# EAGLE board Minisumo_V1 (EAGLE 9.6.2)
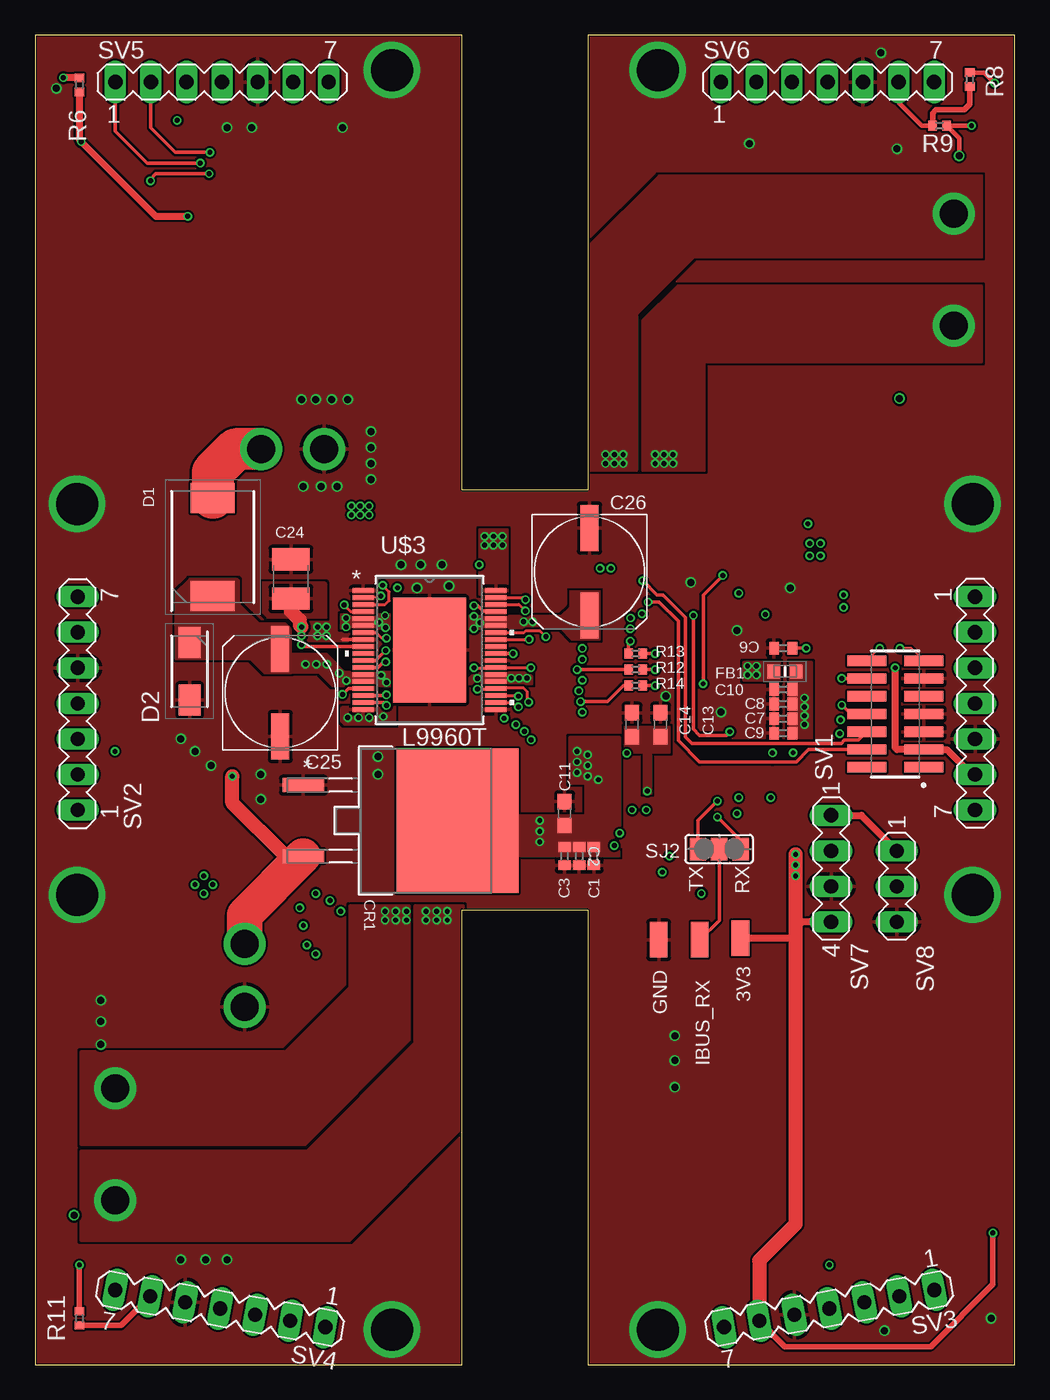
[diagram p0: board, top side]
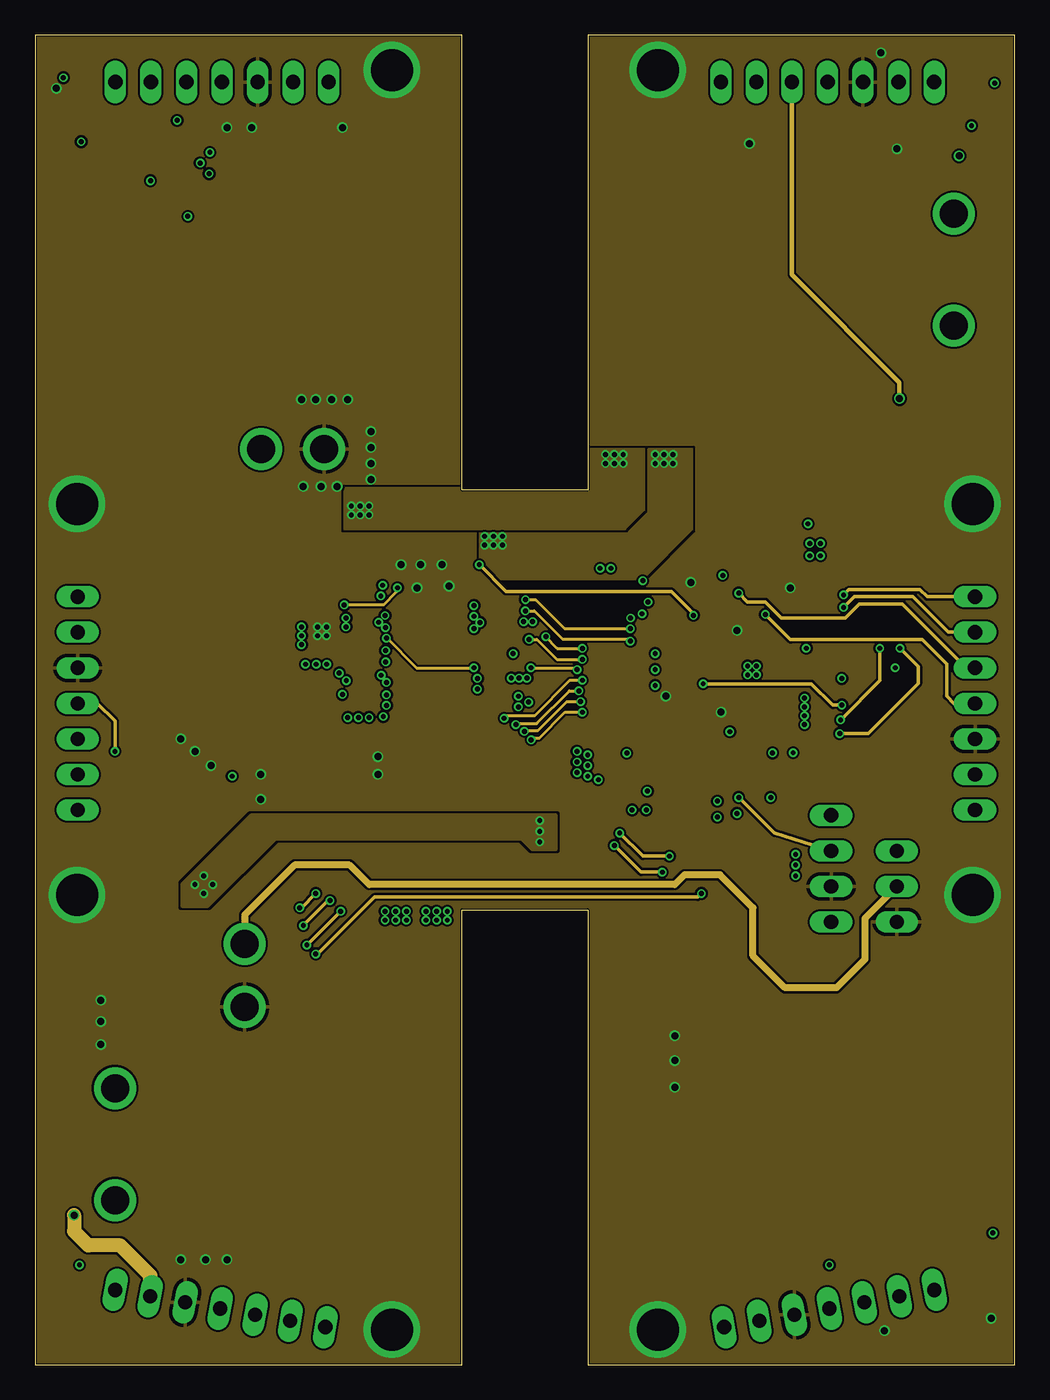
[diagram p1: board, inner layer Route2]
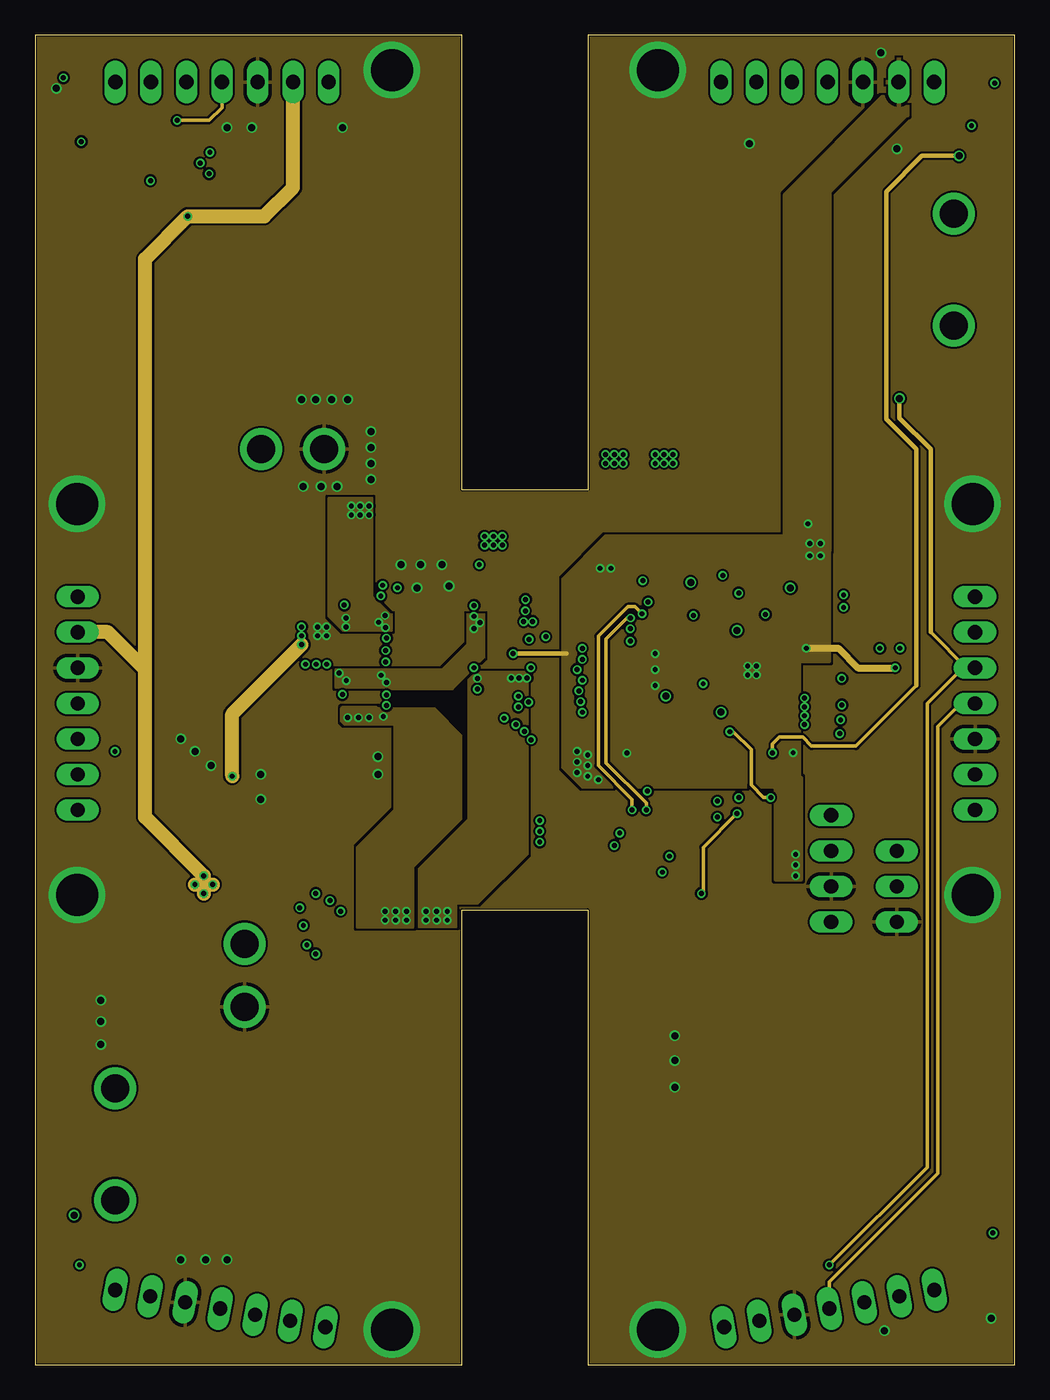
[diagram p2: board, inner layer Route15]
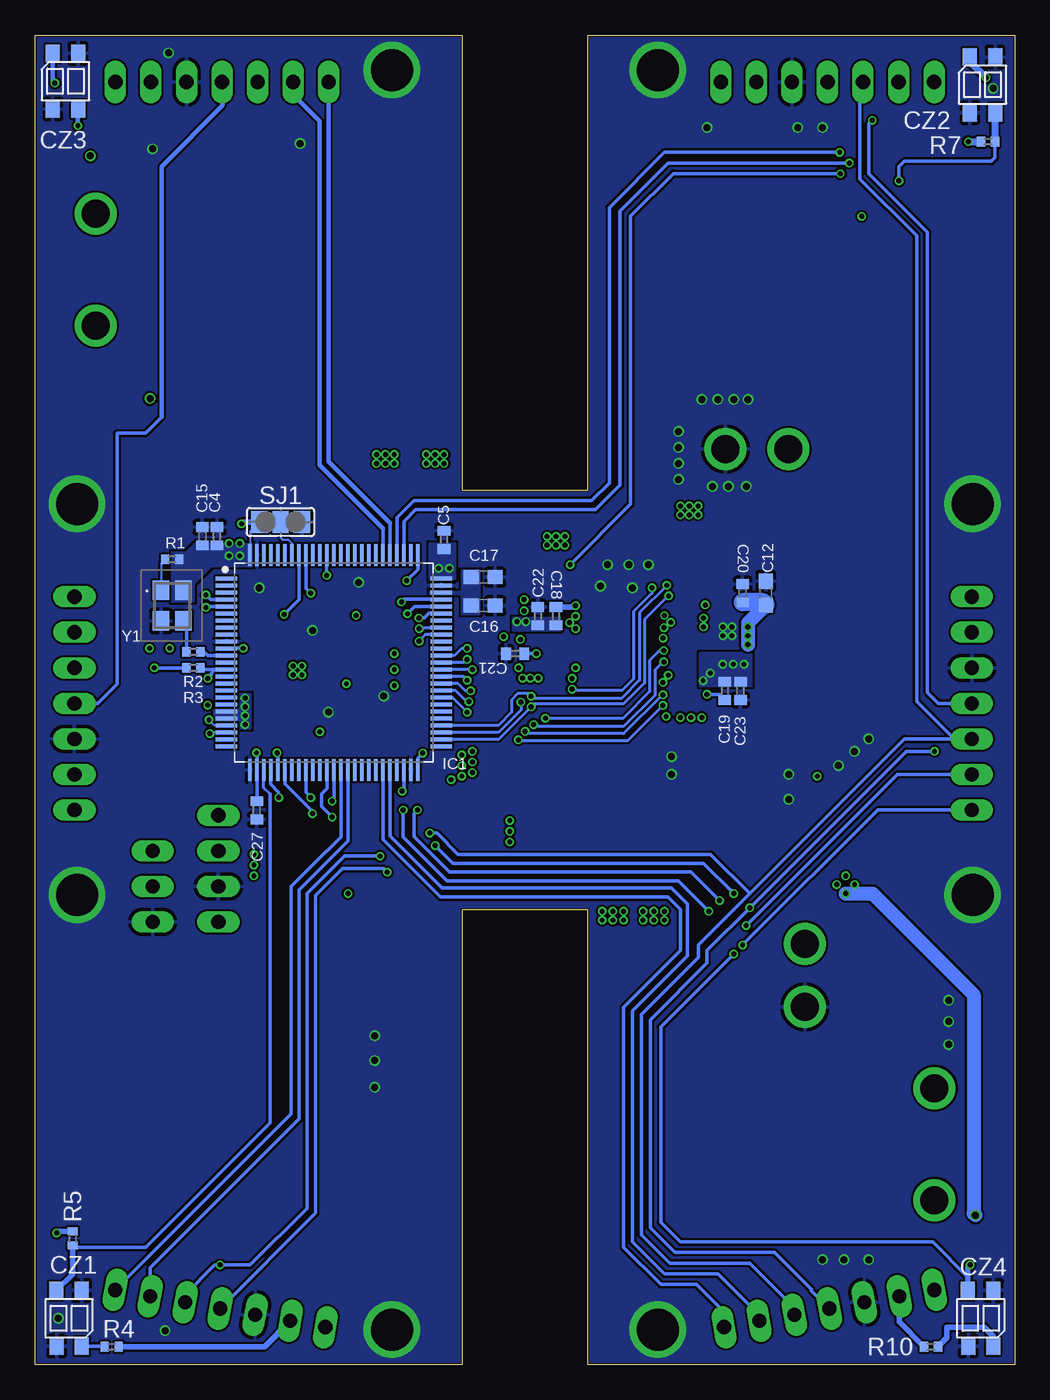
[diagram p3: board, bottom side, seen from below]

Size 70 x 95 mm. Coordinates in mm from the lower left corner, seen from the top.
Outline: 70,95 39.5,95 39.5,62.5 30.5,62.5 30.5,95 0,95 0,0 30.5,0 30.5,32.5 39.5,32.5 39.5,0 70,0 70,95
Copper layers (1*2*15*16): Top 0.035559375mm / dielectric 0.17018125mm / Route2 0.01778125mm / dielectric 47mil / Route15 0.01778125mm / dielectric 0.17018125mm / Bottom 0.035559375mm
Design rules "jlcpcb_4layer *": minimum track width 6mil, minimum drill 0.2mm, track to track 0.1525mm, track to pad 0.1525mm, pad to pad 0.1525mm, via to via 0.1525mm, smd to smd 0mil, copper to edge 0.1mm, drill to drill 5mil, minimum pad ring 5mil, minimum via ring 5mil, stop-mask expansion 3mil, vias tented up to drill 100mil, thermal gap 10mil
Net classes: 1 usb_diff: width 0.127 mm

## Footprints (pad centres in the part's own frame; a part is rotated, then mirrored left to right if it is on the bottom)
SMD1,27-2,54 = smd 1.27 x 2.54: 1 0,0
C0402 = smd 0.7 x 0.9: 1 -0.65,0; 2 0.65,0
C0603 = smd 1.1 x 1: 1 -0.85,0; 2 0.85,0
C1210 = smd 1.6 x 2.7: 1 -1.4,0; 2 1.4,0
UD-8X10_NICHICON = smd 3.3 x 1.3: + 3.125,0; - -3.125,0
D2PAK_STM = smd 0.99 x 2.986: 1 -2.54,-8.763; 2 2.54,-8.763 | smd 10.338 x 8.712: 3 0,2.248
TOP = smd 1.27 x 1: ANODA -1.985,-0.9; EMITER -1.985,0.9; KATODA 1.985,-0.9; KOLEKTOR 1.985,0.91
DIOM8059X265N = smd 2.15 x 3.15: 1 -3.5,0; 2 3.5,0
DIOM5126X265N = smd 2.2 x 1.55: 1 -2.05,0; 2 2.05,0
BEADC1608X95N = smd 0.9 x 1: 1 -0.8,0; 2 0.8,0
QFP50P1600X1600X160-100N = smd 1.559 x 0.28: 1 -7.678,6; 2 -7.678,5.5; 3 -7.678,5; 4 -7.678,4.5; 5 -7.678,4; 6 -7.678,3.5; 7 -7.678,3; 8 -7.678,2.5; 9 -7.678,2; 10 -7.678,1.5; 11 -7.678,1; 12 -7.678,0.5; 13 -7.678,0; 14 -7.678,-0.5; 15 -7.678,-1; 16 -7.678,-1.5; 17 -7.678,-2; 18 -7.678,-2.5; 19 -7.678,-3; 20 -7.678,-3.5; 21 -7.678,-4; 22 -7.678,-4.5; 23 -7.678,-5; 24 -7.678,-5.5; 25 -7.678,-6; 51 7.678,-6; 52 7.678,-5.5; 53 7.678,-5; 54 7.678,-4.5; 55 7.678,-4; 56 7.678,-3.5; 57 7.678,-3; 58 7.678,-2.5; 59 7.678,-2; 60 7.678,-1.5; 61 7.678,-1; 62 7.678,-0.5; 63 7.678,0; 64 7.678,0.5; 65 7.678,1; 66 7.678,1.5; 67 7.678,2; 68 7.678,2.5; 69 7.678,3; 70 7.678,3.5; 71 7.678,4; 72 7.678,4.5; 73 7.678,5; 74 7.678,5.5; 75 7.678,6 | smd 0.28 x 1.559: 26 -6,-7.678; 27 -5.5,-7.678; 28 -5,-7.678; 29 -4.5,-7.678; 30 -4,-7.678; 31 -3.5,-7.678; 32 -3,-7.678; 33 -2.5,-7.678; 34 -2,-7.678; 35 -1.5,-7.678; 36 -1,-7.678; 37 -0.5,-7.678; 38 0,-7.678; 39 0.5,-7.678; 40 1,-7.678; 41 1.5,-7.678; 42 2,-7.678; 43 2.5,-7.678; 44 3,-7.678; 45 3.5,-7.678; 46 4,-7.678; 47 4.5,-7.678; 48 5,-7.678; 49 5.5,-7.678; 50 6,-7.678; 76 6,7.678; 77 5.5,7.678; 78 5,7.678; 79 4.5,7.678; 80 4,7.678; 81 3.5,7.678; 82 3,7.678; 83 2.5,7.678; 84 2,7.678; 85 1.5,7.678; 86 1,7.678; 87 0.5,7.678; 88 0,7.678; 89 -0.5,7.678; 90 -1,7.678; 91 -1.5,7.678; 92 -2,7.678; 93 -2.5,7.678; 94 -3,7.678; 95 -3.5,7.678; 96 -4,7.678; 97 -4.5,7.678; 98 -5,7.678; 99 -5.5,7.678; 100 -6,7.678
SAMTEC_FTSH-107-01-L-DV-K-TR = smd 0.74 x 2.79: 01 -3.81,-2.035; 02 -3.81,2.035; 03 -2.54,-2.035; 04 -2.54,2.035; 05 -1.27,-2.035; 06 -1.27,2.035; 07 0,-2.035; 08 0,2.035; 09 1.27,-2.035; 10 1.27,2.035; 11 2.54,-2.035; 12 2.54,2.035; 13 3.81,-2.035; 14 3.81,2.035
R0402 = smd 0.6 x 0.7: 1 -0.5,0; 2 0.5,0
SJ_2 = smd 1.168 x 1.6: 1 -1.524,0; 2 0,0; 3 1.524,0
MA07-1 = drill 1.016 long: 1 -7.62,0; 2 -5.08,0; 3 -2.54,0; 4 0,0; 5 2.54,0; 6 5.08,0; 7 7.62,0
MA04-1 = drill 1.016 long: 1 -3.81,0; 2 -1.27,0; 3 1.27,0; 4 3.81,0
MA03-1 = drill 1.016 long: 1 -2.54,0; 2 0,0; 3 2.54,0
POWERSSO-36_STM = smd 1.549 x 0.33: 1 -4.737,4.25; 2 -4.737,3.75; 3 -4.737,3.25; 4 -4.737,2.75; 5 -4.737,2.25; 6 -4.737,1.75; 7 -4.737,1.25; 8 -4.737,0.75; 9 -4.737,0.25; 10 -4.737,-0.25; 11 -4.737,-0.75; 12 -4.737,-1.25; 13 -4.737,-1.75; 14 -4.737,-2.25; 15 -4.737,-2.75; 16 -4.737,-3.25; 17 -4.737,-3.75; 18 -4.737,-4.25; 19 4.737,-4.25; 20 4.737,-3.75; 21 4.737,-3.25; 22 4.737,-2.75; 23 4.737,-2.25; 24 4.737,-1.75; 25 4.737,-1.25; 26 4.737,-0.75; 27 4.737,-0.25; 28 4.737,0.25; 29 4.737,0.75; 30 4.737,1.25; 31 4.737,1.75; 32 4.737,2.25; 33 4.737,2.75; 34 4.737,3.25; 35 4.737,3.75; 36 4.737,4.25 | smd 5.207 x 7.493: EPAD 0,0
MD_OUT = drill 2: IN_1 0,4; IN_2 0,-4
BAT_POW = drill 2: P$1 0,2.25; P$2 0,-2.25
ECS3225MV = smd 1.4 x 1.2: 1 -1.1,-0.8; 2 1.1,-0.8; 3 1.1,0.8; 4 -1.1,0.8

## Placement (x,y rotation side)
3V3  [SMD1,27-2,54]  50.42,30.48 0 top
C1  100nF  [C0402]  39.93,36.32 270 top
C2  100nF  [C0402]  38.89,36.32 270 top
C3  100nF  [C0402]  37.85,36.32 270 top
C4  100nF  [C0402]  57,59.18 90 bottom
C5  100nF  [C0402]  40.77,58.93 90 bottom
C6  100nF  [C0402]  53.47,51.18 180 top
C7  100nF  [C0402]  53.47,46.15 180 top
C8  100nF  [C0402]  53.47,47.19 180 top
C9  1uF  [C0402]  53.47,45.11 180 top
C10  1uF  [C0402]  53.47,48.23 180 top
C11  10uF  [C0603]  37.85,39.37 90 top
C12  10uF  [C0603]  17.78,55.12 90 bottom
C13  2.2uF  [C0603]  44.7,45.72 90 top
C14  2.2uF  [C0603]  42.67,45.72 90 top
C15  100nF  [C0402]  58.04,59.18 90 bottom
C16  2.2uF  [C0603]  37.97,54.23 0 bottom
C17  2.2uF  [C0603]  37.97,56.26 0 bottom
C18  100nF  [C0402]  32.77,53.47 270 bottom
C19  100nF  [C0402]  20.7,48.13 90 bottom
C20  100nF  [C0402]  19.43,55.12 270 bottom
C21  100nF  [C0402]  35.69,50.8 180 bottom
C22  1uF  [C0402]  34.06,53.47 270 bottom
C23  1uF  [C0402]  19.58,48.13 90 bottom
C24  10uF  [C1210]  18.29,56.13 90 top
C25  100uF  [UD-8X10_NICHICON]  17.53,48.01 90 top
C26  100uF  [UD-8X10_NICHICON]  39.62,56.64 270 top
C27  100nF  [C0402]  54.15,39.6 270 bottom
CR1  LD1086DT33TR  [D2PAK_STM]  27.94,38.86 270 top
CZ1  KTIR0711S  [TOP]  67.56,3.3 90 bottom
CZ2  KTIR0711S  [TOP]  2.29,91.44 270 bottom
CZ3  KTIR0711S  [TOP]  67.82,91.69 270 bottom
CZ4  KTIR0711S  [TOP]  2.41,3.3 90 bottom
D1  STPS5L60S  [DIOM8059X265N]  12.7,58.42 90 top
D2  SMA6T33AY  [DIOM5126X265N]  11.05,49.53 270 top
FB1  MMZ1608Y601BTA00  [BEADC1608X95N]  53.59,49.53 0 top
GND  [SMD1,27-2,54]  44.58,30.35 0 top
IBUS_RX  [SMD1,27-2,54]  47.5,30.35 0 top
IC1  STM32H743VIT6NORMAL  [QFP50P1600X1600X160-100N]  48.64,50.16 0 bottom
J1  FTSH-107-01-L-DV-K-TR  [SAMTEC_FTSH-107-01-L-DV-K-TR]  61.47,46.48 90 top
R1  10k  [R0402]  60.2,57.53 180 bottom
R2  51  [R0402]  58.67,50.93 0 bottom
R3  10k  [R0402]  58.67,49.78 180 bottom
R4  200  [R0402]  64.52,1.27 0 bottom
R5  10k  [R0402]  67.31,9.02 90 bottom
R6  200  [R0402]  3.17,91.44 270 top
R7  10k  [R0402]  1.91,87.38 180 bottom
R8  200  [R0402]  66.8,91.82 270 top
R9  10k  [R0402]  64.64,88.52 180 top
R10  200  [R0402]  5.97,1.27 180 bottom
R11  10k  [R0402]  3.17,3.3 270 top
R12  10k  [R0402]  42.93,49.66 0 top
R13  10k  [R0402]  42.93,50.8 180 top
R14  10k  [R0402]  42.93,48.51 0 top
SJ1  [SJ_2]  52.45,60.2 180 bottom
SJ2  [SJ_2]  48.9,36.83 180 top
SV1  [MA07-1]  67.18,47.24 270 top
SV2  [MA07-1]  3.05,47.24 90 top
SV3  [MA07-1]  56.76,4 190 top
SV4  [MA07-1]  13.24,4 170 top
SV5  [MA07-1]  13.37,91.64 0 top
SV6  [MA07-1]  56.63,91.64 0 top
SV7  [MA04-1]  56.9,35.43 270 top
SV8  [MA03-1]  61.59,34.16 270 top
U$3  L9960T  [POWERSSO-36_STM]  28.19,51.05 0 top
U$4  MD_OUT  [MD_OUT]  65.66,78.23 0 top
U$5  MD_OUT  [MD_OUT]  5.71,15.75 180 top
U$6  BAT_POW  [BAT_POW]  18.41,65.41 90 top
U$7  BAT_POW  [BAT_POW]  14.99,27.81 0 top
Y1  ECS-3225MV  [ECS3225MV]  60.2,54.23 270 bottom

## Library data of the parts
3V3 GND IBUS_RX = wirepad
C1-C8 C15 C18-C21 C27 = AcceleratedDesigns_Lib
C9 C10 C22 C23 = rcl; MANUFACTURER_PART_NO: EMK105BJ105KV-F; SPICEPREFIX: C; VENDOR: Taiyo Yuden
C11 C12 C14 C17 = rcl; MANUFACTURER_PART_NO: GRM188R61E106KA73D; SPICEPREFIX: C; VENDOR: Murata
C13 C16 = rcl; MANUFACTURER_PART_NO: EMK107BJ225KA-T; SPICEPREFIX: C; VENDOR: Taiyo Yuden
C24 = rcl; MANUFACTURER_PART_NO: UMK325AB7106KMHP; SPICEPREFIX: C
C25 C26 = rcl; MANUFACTURER_PART_NO: RVT1H101M0810; SPICEPREFIX: C
CR1 = ST_Power; COPYRIGHT: Copyright (C) 2021 Ultra Librarian. All rights reserved.; MANUFACTURER_PART_NUMBER: LD1086DT33TR; MFR_NAME: STMicroelectronics
CZ1-CZ4 = KTIR0711S; MANUFACTURER_PART_NO: ITR8307/S18/TR8(B)
D1 = SamacSys_Parts; DESCRIPTION: STMicroelectronics STPS5L60S, SMT Schottky Diode, 60V 5A, 2-Pin DO-214AB; HEIGHT: 2.65mm; MANUFACTURER_NAME: STMicroelectronics; MANUFACTURER_PART_NUMBER: STPS5L60S; MOUSER_PART_NUMBER: 511-STPS5L60S; MOUSER_PRICE-STOCK: https://www.mouser.co.uk/ProductDetail/STMicroelectronics/STPS5L60S?qs=%252BB84zevwoRCxtciFC%252BzmMw%3D%3D
D2 = SamacSys_Parts; DESCRIPTION: ESD Suppressors / TVS Diodes 600W 4kW Transil SMA 5V to 70V Uni; HEIGHT: 2.65mm; MANUFACTURER_NAME: STMicroelectronics; MANUFACTURER_PART_NUMBER: SMA6T33AY; MOUSER_PART_NUMBER: 511-SMA6T33AY; MOUSER_PRICE-STOCK: https://www.mouser.co.uk/ProductDetail/STMicroelectronics/SMA6T33AY?qs=NW1tGwZwExGor%2FvZVbtWhA%3D%3D
FB1 = SamacSys_Parts; DESCRIPTION: TDK - MMZ1608Y601BTA00 - Ferrite Bead, 0603 [1608 Metric], 600 ohm, 500 mA, MMZ Series, 0.4 ohm, +/- 25%; HEIGHT: 0.95mm; MANUFACTURER_NAME: TDK; MANUFACTURER_PART_NUMBER: MMZ1608Y601BTA00; MOUSER_PART_NUMBER: 810-MMZ1608Y601BTA00; MOUSER_PRICE-STOCK: https://www.mouser.co.uk/ProductDetail/TDK/MMZ1608Y601BTA00?qs=pLY5GE0xrmIZFSJpXFN%252BVg%3D%3D
IC1 U$4-U$7 = SamacSys_Parts
J1 = FTSH-107-01-L-DV-K-TR; MANUFACTURER: Samtec; PARTREV: R; STANDARD: Manufacturer Recommendations
R1-R14 = rcl; SPICEPREFIX: R
SJ1 SJ2 = jumper
SV1-SV8 = con-lstb; OC_FARNELL: unknown; OC_NEWARK: unknown
U$3 = l9960
Y1 = ECS-3225MV; DESCRIPTION: 24MHz XO (Standard) HCMOS Oscillator 1.62V ~ 3.63V Enable/Disable 4-SMD, No Lead; HEIGHT: 1.2mm; MANUFACTURER_NAME: ECS; MANUFACTURER_PART_NUMBER: ECS-3225MV

## Nets
5V_SW: C12.1 C20.2 C24.1 CR1.2 SV8.2 U$3.9 U$7.P$1
+3.3V: 3V3.1 C1.1 C2.1 C3.1 C4.1 C5.1 C6.1 C11.1 C15.1 C21.1 C27.1 CR1.3 FB1.1 IC1.11 IC1.27 IC1.50 IC1.75 IC1.100 J1.03 R1.1 R3.2 R4.2 R5.2 R6.2 R7.2 R8.2 R9.2 R10.2 R11.2 R12.2 R13.1 R14.2 SJ1.3 SV1.6 SV2.6 SV3.6 SV4.6 SV5.6 SV6.6 SV7.4 U$3.27 Y1.4
GND: C1.2 C2.2 C3.2 C4.2 C5.2 C6.2 C7.2 C8.2 C9.2 C10.2 C11.2 C12.2 C13.2 C14.2 C15.2 C16.2 C17.2 C20.1 C21.2 C22.1 C23.1 C24.2 C25.- C26.- C27.2 CR1.1 CZ1.EMITER CZ1.KATODA CZ2.EMITER CZ2.KATODA CZ3.EMITER CZ3.KATODA CZ4.EMITER CZ4.KATODA D2.2 GND.1 IC1.10 IC1.26 IC1.49 IC1.74 IC1.99 J1.05 J1.07 J1.11 SJ1.1 SV1.5 SV2.5 SV3.5 SV4.5 SV5.5 SV6.5 SV7.3 SV8.3 U$3.1 U$3.8 U$3.19 U$3.26 U$3.EPAD U$6.P$2 U$7.P$2 Y1.2
IBUS_RX: IBUS_RX.1 SJ2.2
KILL_SW: SV7.1 SV8.1
MD_CS1: IC1.68 U$3.35
MD_CS2: IC1.58 U$3.17
MD_DIS1: IC1.67 R13.2 U$3.34
MD_DIS2: IC1.59 R14.1 U$3.16
MD_IN1_PWM_A: IC1.63 U$3.29
MD_IN1_PWM_B: IC1.61 U$3.11
MD_IN2_DIR_A: IC1.64 U$3.30
MD_IN2_DIR_B: IC1.60 U$3.12
MD_NDIS: IC1.62 R12.1 U$3.7 U$3.25
MD_OUT1A: U$3.5 U$3.6 U$4.IN_1
MD_OUT1B: U$3.23 U$3.24 U$5.IN_1
MD_OUT2A: U$3.36 U$4.IN_2
MD_OUT2B: U$3.18 U$5.IN_2
MD_VS: C18.2 C19.2 C22.2 C23.2 C25.+ C26.+ D1.1 D2.1 U$3.13 U$3.14 U$3.31 U$3.32
N$1: IC1.94 SJ1.2
N$2: R2.1 Y1.3
N$3: R1.2 Y1.1
N$4: IC1.12 R2.2
N$6: C18.1 U$3.33
N$8: CZ1.ANODA R4.1
N$9: CZ2.ANODA R6.1
N$10: CZ3.ANODA R8.1
N$11: CZ4.ANODA R10.1
N$16: C19.1 U$3.15
NRST: IC1.14 J1.12 R3.1
RX: IC1.37 SJ2.1
S_WIRE: IC1.38 SJ2.3
SPI_CLK: IC1.52 U$3.2 U$3.20
SPI_MISO: IC1.53 U$3.4 U$3.22
SPI_MOSI: IC1.54 U$3.3 U$3.21
START_SW: IC1.34 SV7.2
SWCLK: IC1.76 J1.06
SWDIO: IC1.72 J1.04
SWO: IC1.89 J1.08
TOF_GPIO1: IC1.4 SV1.1
TOF_GPIO2: IC1.70 SV2.1
TOF_GPIO3: IC1.39 SV3.1
TOF_GPIO4: IC1.45 SV4.1
TOF_GPIO5: IC1.78 SV5.1
TOF_GPIO6: IC1.80 SV6.1
TOF_SCL: IC1.92 SV1.3 SV2.3 SV3.3 SV4.3 SV5.3 SV6.3
TOF_SDA: IC1.93 SV1.4 SV2.4 SV3.4 SV4.4 SV5.4 SV6.4
V_BAT: D1.2 U$6.P$1
V_LS_1: CZ1.KOLEKTOR IC1.28 R5.1
V_LS_2: CZ2.KOLEKTOR IC1.29 R7.1
V_LS_3: CZ3.KOLEKTOR IC1.30 R9.1
V_LS_4: CZ4.KOLEKTOR IC1.31 R11.1
VCAP: C13.1 C14.1 IC1.48
VCAP_2: C16.1 C17.1 IC1.73
VCP_RX: IC1.23 J1.13
VCP_TX: IC1.22 J1.14
VDDA: C7.1 C8.1 C9.1 C10.1 FB1.2 IC1.20 IC1.21
VOUT_TOF1: SV1.7
VOUT_TOF2: SV2.7
VOUT_TOF3: SV3.7
VOUT_TOF4: SV4.7
VOUT_TOF5: SV5.7
VOUT_TOF6: SV6.7
XSHUT1: IC1.5 SV1.2
XSHUT2: IC1.71 SV2.2
XSHUT3: IC1.40 SV3.2
XSHUT4: IC1.46 SV4.2
XSHUT5: IC1.79 SV5.2
XSHUT6: IC1.81 SV6.2

## Tracks (layer width: path | path; a pad name or v marks a point on that pad's centre or on a via)
5V_SW  (via drill 0.35)
  Top 0.254: U$3.9 19.18,51.31 v19.05,51.44
  Top 1.016: CR1.2 17.91,36.32 14.1,40.13 v14.1,42.04 | v19.05,52.7 18.94,52.82 18.94,53.17 18.29,53.82 C24.1
  Top 2.54: U$7.P$1 14.99,32.13 CR1.2
  Route2 0.508: SV8.2 59.31,31.88 59.31,28.96 57.28,26.92 53.59,26.92 51.31,29.21 51.31,32.64 48.96,34.99 46.42,34.99 45.72,34.29 23.88,34.29 22.48,35.69 18.54,35.69 14.99,32.13 U$7.P$1
  Route15 1.016: v14.1,42.04 14.1,46.48 v19.05,51.44
  Bottom 1.016: C12.1 19.05,53 v19.05,52.7 v19.05,52.07 v19.05,51.44
  Bottom 1.27: C12.1 17.98,54.47 C20.2
  pour Top: 16.26,55.88 16.26,53.72 16.61,53.37 20.83,53.37 20.83,55.75 20.7,55.88
+3.3V  (via drill 0.35, 0.5)
  Top 0.254: C6.1 v55.12,51.18 | U$3.27 v34.16,50.8 | R13.1 v44.32,50.8 | R12.2 v44.32,49.66 | R14.2 v44.32,48.51
  Top 0.305: R9.2 63.37,88.52 61.72,90.18 SV6.6
  Top 0.406: SV3.6 53.61,1.27 64.01,1.27 68.45,5.71 v68.45,9.4 | R11.2 6.16,2.8 8.26,4.9 | R9.2 64.14,89.42 64.39,89.66 66.42,89.66 66.8,90.04 R8.2
  Top 0.508: v61.47,49.78 61.47,44.07 61.59,43.94 J1.03 65.15,43.94 66.93,42.16 SV1.6 | R6.2 3.17,87.5 v3.3,87.38 8.64,82.04 v10.92,82.04 | SV7.4 54.86,31.62 54.36,31.88 | 3V3.1 54.36,30.48
  Top 1.016: 8.26,4.9 SV4.6 | v54.36,36.45 54.36,31.88 54.36,30.48 54.36,10.03 51.76,7.44 SV3.6
  Route2 1.016: SV4.6 8.23,6.37 6.1,8.51 3.81,8.51 2.79,9.53 v2.79,10.67
  Route15 0.305: v34.16,50.8 37.97,50.8
  Route15 0.508: v55.12,51.18 57.4,51.18 58.8,49.78 v61.47,49.78
  Route15 1.016: SV2.6 5.21,52.32 7.87,49.66 | 7.87,49.66 7.87,39.12 v12.06,34.92 v12.06,33.66 | 7.87,49.66 7.87,78.99 v10.92,82.04 16.38,82.04 18.45,84.1 SV5.6 | v11.43,34.29 v12.7,34.29
  Bottom 0.152: SJ1.3 54.64,59.53 IC1.100 | C27.1
  Bottom 0.254: C27.1 IC1.27 54.14,43.68 v54.18,43.71 | IC1.50 42.64,43.34 v42.29,43.69 | v55.12,51.18 56.3,51.18 IC1.11 | C21.1 v34.16,50.8 | v61.47,49.78 R3.2
  Bottom 0.406: R4.2 53.61,1.27 SV3.6 | v68.45,9.4 68.33,9.52 R5.2 | R10.2 8.23,3.04 SV4.6 | SJ1.3 55.12,60.2 v55.24,60.07
  Bottom 0.508: v3.3,87.38 R7.2
  Bottom 1.016: v12.06,33.66 10.16,33.66 2.92,26.42 2.92,10.79 v2.79,10.67
  other vias: 50.93,49.91 50.93,49.28 51.56,49.28 51.56,49.91 38.73,43.81 39.5,43.56 38.73,43.05 38.73,42.29 39.5,42.04 39.5,42.8 40.26,41.78 54.36,34.92 54.36,35.69 36.07,38.86 36.07,38.1 36.07,37.34 55.37,57.78 56.13,57.78 55.37,58.67 56.13,58.67 40.39,56.9 41.15,56.9
  pour Bottom (no thermals): 54.48,58.67 54.48,57.02 57.4,57.02 58.67,55.75 58.67,54.48 60.2,54.48 60.2,58.04 59.18,58.04 58.55,58.67
  pour Top (no thermals): 34.04,39.24 34.04,36.32 41.78,36.32 41.78,39.24
  pour Route15: 54.61,41.27 39.12,41.27 37.72,42.67 37.72,56.13 40.77,59.18 56.77,59.18 56.77,50.23 54.61,50.23
  pour Top (no thermals): 53.21,48.9 50.67,48.9 50.67,50.16 53.21,50.16
  pour Top: 39.37,38.23 39.37,41.53 38.23,41.53 38.23,44.83 41.78,44.83 41.78,38.23
  pour Route15: 53.59,58.42 53.59,83.57 60.96,90.93 60.96,92.84 61.34,93.22 62.36,93.22 62.36,89.28 62.29,89.34 56.77,83.82 56.77,58.17 53.85,58.17
  pour Route15: 52.96,41.91 52.96,34.67 54.74,34.67 54.74,41.91
  pour Route2: 37.21,36.83 37.21,39.24 15.49,39.24 10.54,34.29 10.54,32.77 12.32,32.77 17.14,37.59 34.8,37.59 35.56,36.83
  pour Bottom (no thermals): 41.15,58.67 40.01,58.67 40.01,56.13 41.78,56.13 41.78,58.67
GND  (via drill 0.35, 0.5, 3)
  Top 0.254: 21.97,51.81 22.68,51.81 22.7,51.8 U$3.8
  other vias: 3,61.5 25.5,2.5 3,33.55 25.5,92.5 44.5,92.5 67,61.5 67,33.55 44.5,2.5 20.19,52.7 20.19,52.07 20.83,52.07 20.83,52.7 19.05,68.96 20.07,68.96 21.21,68.96 22.35,68.96 24,66.67 24,65.53 24,64.39 24,63.25 21.59,62.74 20.45,62.74 19.18,62.74 10.41,44.7 11.43,43.81 12.57,42.8 4.7,26.04 4.7,24.51 4.7,22.86 12.19,7.49 13.72,7.49 10.41,7.49 45.72,23.5 45.72,21.72 45.72,19.81 60.71,2.41 68.33,3.3 45.09,47.75 50.16,52.45 46.86,55.88 49.02,46.61 53.98,55.5 15.49,88.39 21.97,88.39 13.72,88.39 1.52,91.19 51.05,87.25 61.59,86.87 60.45,93.73 16.13,40.39 16.13,42.16 24.51,42.16 24.51,43.43 26.16,57.15 27.56,57.15 29.08,57.15 29.59,55.63 27.3,55.5
  pour Top (rank 6): 0,-0.64 30.48,-0.64 30.48,32.38 39.37,32.38 39.37,0 70.48,0 70.48,95.25 39.37,95.25 39.37,62.87 30.48,62.87 30.48,95.25 0,95.25
  pour Bottom (rank 6): -1.02,95 -1.02,-0.76 72.64,-0.76 72.64,95
  pour Route2 (rank 6): -2.03,95.25 -2.03,-0.51 71.63,-0.51 71.63,95.25
  pour Route15 (rank 6): -2.29,95.25 -2.29,-0.64 71.75,-0.64 71.75,95.25
IBUS_RX
  Top 0.254: IBUS_RX.1 48.9,31.75 SJ2.2
KILL_SW
  Top 0.508: SV7.1 59.05,39.24 SV8.1
MD_CS1  (via drill 0.35)
  Top 0.2: U$3.35 34.9,54.8 v35.05,54.66
  Route2 0.2: v35.05,54.66 35.77,54.66 37.85,52.58 v42.55,52.58
  Bottom 0.2: v42.55,52.58 42.42,52.58 42.33,52.66 IC1.68
MD_CS2  (via drill 0.35)
  Top 0.254: U$3.17 24.91,47.3 v25.12,47.09
  Route2 0.2: v35.45,44.64 35.56,44.74 36.01,44.74 37.88,46.61 v39.12,46.61
  Bottom 0.2: v25.12,47.09 27.64,44.58 35.4,44.58 v35.45,44.64 | v39.12,46.61 40.17,47.66 IC1.58
MD_DIS1  (via drill 0.35)
  Top 0.2: U$3.34 34.59,54.3 v35.04,53.85
  Top 0.254: v42.55,51.68 42.43,51.56 R13.2
  Route2 0.2: v35.04,53.85 35.69,53.85 37.72,51.81 42.42,51.81 v42.55,51.68
  Bottom 0.2: v42.55,51.68 42.55,51.72 42.11,52.16 IC1.67
MD_DIS2  (via drill 0.35)
  Top 0.254: U$3.16 25.07,47.8 v25.12,47.85 | R14.1 42.06,48.51 40.92,47.37 v38.99,47.37
  Route2 0.2: v34.98,45.24 35.05,45.32 35.96,45.32 38.01,47.37 v38.99,47.37
  Bottom 0.2: 25.17,47.85 27.94,45.09 34.81,45.09 v34.98,45.24 | v38.99,47.37 39.17,47.37 39.96,48.16 IC1.59
  Bottom 0.254: 25.17,47.85 v25.12,47.85
MD_IN1_PWM_A  (via drill 0.35)
  Top 0.2: U$3.29 32.94,51.82 v35.31,51.82
  Route2 0.2: v35.31,51.82 35.86,51.82 37.29,50.39 v39.12,50.39
  Bottom 0.2: v39.12,50.39 39.34,50.16 IC1.63
MD_IN1_PWM_B  (via drill 0.35)
  Top 0.254: U$3.11 24.34,50.31 25.04,51.02 v25.06,51.02
  Route2 0.2: v33.53,46.18 33.71,46.35 35.69,46.35 38.23,48.9 v39.12,48.9
  Bottom 0.2: v25.06,51.02 25.38,51.02 26.09,50.31 26.09,48.07 27.98,46.18 v33.53,46.18 | v39.12,48.9 39.39,49.16 IC1.61
MD_IN2_DIR_A  (via drill 0.35)
  Top 0.2: U$3.30 34.96,52.3 35.1,52.45 36.07,52.45 v36.51,52
  Route2 0.2: v36.51,52 36.51,51.97 37.31,51.17 v39.12,51.17
  Bottom 0.2: v39.12,51.17 39.5,51.17 40.01,50.66 IC1.64
MD_IN2_DIR_B  (via drill 0.35)
  Top 0.254: U$3.12 24.51,49.81 24.81,50.1 24.95,50.1 v25.06,50.21
  Route2 0.2: v34.37,45.73 34.44,45.8 35.85,45.8 38.18,48.13 v38.86,48.13
  Bottom 0.2: 25.14,50.19 25.7,49.62 25.7,47.82 27.93,45.59 34.36,45.59 34.37,45.6 v34.37,45.73 | v38.86,48.13 39.24,48.13 39.77,48.66 IC1.60
  Bottom 0.254: v25.06,50.21 25.06,50.19 25.14,50.19
MD_NDIS  (via drill 0.35)
  Top 0.2: v35.43,49.78 35.41,49.8 U$3.25 32.91,49.78 v31.37,49.78 | v25.12,51.9 24.77,51.9 24.37,52.3 U$3.7
  Top 0.254: R12.1 v38.73,49.66
  Route2 0.2: v35.43,49.78 38.61,49.78 v38.73,49.66 | v25.12,51.9 25.14,51.9 27.26,49.78 v31.37,49.78
  Bottom 0.2: IC1.62 v38.73,49.66
MD_OUT1A  (via drill 0.35)
  other vias: 24.56,53.04 25.02,53.52 25.04,52.65 22.23,53.34 22.23,52.7 22.61,60.71 23.24,60.71 23.88,60.71 22.61,61.34 23.24,61.34 23.88,61.34 40.77,65.02 41.4,65.02 42.04,65.02 40.77,64.39 41.4,64.39 42.04,64.39
  pour Top (no thermals): 25.4,53.59 21.84,53.59 21.84,52.58 25.4,52.58
  pour Route15: 20.95,61.91 20.95,53.47 21.97,52.45 25.53,52.45 25.53,53.59 25.4,53.59 24.13,54.86 24.13,61.91
  pour Route2: 22.1,62.61 22.1,59.69 42.16,59.69 43.56,61.09 43.56,65.41 39.5,65.41 39.5,62.61
  pour Top (no thermals): 39.5,63.88 43.05,63.88 43.05,75.06 47.12,79.12 67.69,79.12 67.69,84.96 44.58,84.96 39.5,79.88
MD_OUT1B  (via drill 0.35)
  other vias: 27.94,32.38 28.7,32.38 29.46,32.38 28.7,31.75 29.46,31.75 27.94,31.75 31.62,49.02 34.04,49.05 34.59,49.05 35.15,49.05
  pour Top (no thermals): 35.18,49.53 31.5,49.53 30.99,49.02 30.99,48.64 35.56,48.64 35.56,49.15
  pour Route15: 30.99,38.99 30.99,48.95 31.57,49.53 35.05,49.53 35.18,49.4 35.18,36.45 31.62,32.89 30.1,32.89 30.1,31.24 27.43,31.24 27.43,35.43
  pour Top (no thermals): 27.18,32.77 27.18,22.99 19.43,15.24 3.3,15.24 3.3,8.89 22.48,8.89 30.61,17.02 30.61,32.77
MD_OUT2A  (via drill 0.35)
  other vias: 32.13,59.18 32.77,59.18 33.4,59.18 32.13,58.55 32.77,58.55 33.4,58.55 44.32,65.02 44.96,65.02 45.59,65.02 44.32,64.39 44.96,64.39 45.59,64.39
  pour Top: 33.78,54.99 31.75,54.99 31.75,59.69 33.78,59.69
  pour Route2 (rank 2): 31.75,56.13 43.43,56.13 46.99,59.69 46.99,65.41 43.81,65.41 43.81,61.09 42.16,59.44 31.75,59.44
  pour Top (no thermals): 43.38,63.88 47.88,63.88 47.88,71.63 67.69,71.63 67.69,77.09 45.9,77.09 43.38,74.57
MD_OUT2B  (via drill 0.35)
  other vias: 25.02,32.38 25.78,32.38 26.54,32.38 25.02,31.75 25.78,31.75 26.54,31.75 22.35,46.23 23.11,46.23 23.88,46.23 24.89,46.3
  pour Top: 25.78,46.99 21.97,46.99 21.84,46.86 21.84,45.97 22.1,45.72 25.78,45.72
  pour Route15: 24.51,46.86 24.38,46.99 21.97,46.99 21.84,46.86 21.84,45.97 22.1,45.72 25.65,45.72 25.65,39.62 22.99,36.96 22.99,31.24 27.05,31.24 27.05,35.56 30.48,38.99 30.48,44.96 28.57,46.86
  pour Top (no thermals): 22.5,32.77 22.5,26.95 17.91,22.35 3.3,22.35 3.3,15.75 19.3,15.75 26.75,23.19 26.75,32.77
MD_VS  (via drill 0.35)
  other vias: 31.37,53.47 31.37,52.58 31.8,53.01 24.74,49.25 21.74,49.4 22.25,48.87 25.12,48.74 20.85,50.04 20.09,50.04 19.33,50.04 34.92,53.09 35.56,53.09
  pour Top (no thermals): 14.48,56.13 11.05,56.13 10.03,55.12 10.03,50.42 15.37,50.42 16.38,49.4 18.29,49.4 18.29,52.58 17.91,52.96 16,52.96 14.61,54.36 14.61,56.01
  pour Top (no thermals): 25.53,49.53 25.53,48.44 21.29,48.44 20.32,49.4 18.29,49.4 18.29,50.8 20.83,50.8 22.1,49.53
  pour Top (no thermals): 33.78,53.47 30.99,53.47 30.99,52.58 33.78,52.58
  pour Route15: 32.13,53.59 30.86,53.59 30.86,51.44 29.08,49.66 21.46,49.66 21.46,48.39 25.27,48.39 25.4,48.26 29.84,48.26 32.13,50.55
  pour Top (no thermals): 40.39,55.24 38.23,55.24 38.23,54.1 37.59,53.47 33.66,53.47 33.66,52.58 37.59,52.58 38.35,51.82 40.39,51.82
  pour Bottom (no thermals): 18.8,48.51 18.8,50.8 22.48,50.8 22.48,48.51
  pour Bottom (no thermals): 35.81,53.34 32.51,53.34 32.51,52.45 35.81,52.45
N$1
  Bottom 0.152: SJ1.2 52.45,59.08 52.32,58.95 51.92,58.95 51.64,58.68 IC1.94
N$2
  Bottom 0.152: Y1.3 59.17,52.91
  Bottom 0.254: 59.17,52.91 R2.1
N$3
  Bottom 0.152: R1.2 61,57.23 Y1.1
N$4
  Bottom 0.152: IC1.12 56.33,50.67
  Bottom 0.254: R2.2 57.91,50.93 57.66,50.67 56.33,50.67
N$6  (via drill 0.35)
  Top 0.254: U$3.33 32.9,53.84 32.03,53.84 31.63,54.23 v31.37,54.23
  Bottom 0.406: C18.1 31.48,54.12 v31.37,54.23
N$8
  Bottom 0.254: R4.1 65.06,1.32 CZ1.ANODA
N$9  (via drill 0.35)
  Top 0.508: R6.1 v2.04,91.94 v2.03,91.95
  Bottom 0.508: v2.03,91.95 3.19,93.1 CZ2.ANODA
N$10  (via drill 0.35)
  Top 0.305: R8.1 67.83,92.32 v68.58,91.57
  Bottom 0.305: v68.58,91.57 68.72,91.7 CZ3.ANODA
N$11
  Bottom 0.406: R10.1 4.83,1.91 4.83,2.67 2.16,2.67 1.51,2.02 CZ4.ANODA
N$16  (via drill 0.35)
  Top 0.254: v21.97,47.88 22.4,48.3 U$3.15
  Bottom 0.254: C19.1 21.1,47.88 v21.97,47.88
NRST  (via drill 0.35)
  Top 0.254: v57.66,49.02 J1.12
  Bottom 0.152: IC1.14 57.15,49.66 | 58.05,49.66 R3.1
  Bottom 0.254: v57.66,49.02 57.43,49.25 57.43,49.39 57.15,49.66 | IC1.14 58.05,49.66
RX  (via drill 0.35)
  Top 0.254: SJ2.1 50.42,37.47 v48.77,39.12
  Bottom 0.254: v48.77,39.12 49.53,39.88 49.53,40.77 49.14,41.16 IC1.37
S_WIRE  (via drill 0.35)
  Top 0.254: SJ2.3 47.37,38.86 v48.77,40.26
  Bottom 0.254: v48.77,40.26 48.64,40.39 IC1.38
SPI_CLK  (via drill 0.35)
  Top 0.152: v24.71,54.91 24.6,54.8 U$3.2
  Top 0.2: U$3.20 34.1,47.3 34.42,46.99 v34.54,46.99
  Bottom 0.2: v24.71,54.91 24.77,54.91 26.44,53.24 26.44,48.69 27.91,47.22 34.31,47.22 v34.54,46.99 36.87,44.66 IC1.52
SPI_MISO  (via drill 0.35)
  Top 0.152: 32.89,48.26 U$3.22
  Top 0.2: v35.28,47.33 35.15,47.46 35.15,48.1 34.9,48.35 32.98,48.35 U$3.22 | v31.62,48.26 32.89,48.26 | U$3.4 23.44,53.78 22.59,53.78 v22.1,54.27
  Route2 0.2: v25.91,55.5 25.85,55.44 25.85,55.21 24.91,54.27 v22.1,54.27
  Bottom 0.2: v31.62,48.26 31.55,48.18 28.03,48.18 27.23,48.99 27.23,53.8 25.91,55.12 v25.91,55.5 | v35.28,47.33 35.28,46.76 36.88,45.16 IC1.53
SPI_MOSI  (via drill 0.35)
  Top 0.152: 34.49,47.8 v34.54,47.75
  Top 0.2: U$3.21 34.49,47.8 | U$3.3 25.04,54.3 25.32,54.59 25.32,55.2 v24.84,55.68
  Bottom 0.152: v34.54,47.75 34.72,47.93
  Bottom 0.2: 34.72,47.93 35.51,47.93 35.94,47.5 35.94,46.61 36.88,45.66 IC1.54 | v24.84,55.68 26.8,53.72 26.8,48.9 28.07,47.62 34.42,47.62 v34.54,47.75
START_SW  (via drill 0.35)
  Route2 0.254: SV7.2 52.86,37.97 50.32,40.51 v50.29,40.51
  Bottom 0.254: v50.29,40.51 50.64,40.86 IC1.34
SWCLK  (via drill 0.35)
  Top 0.254: J1.06 58.84,44.62 57.86,44.62 57.62,44.38 46.93,44.38 46.48,44.83 46.48,53.37 44.86,54.99 44.45,54.99 v43.43,56.01
  Bottom 0.254: v43.43,56.01 42.64,56.8 IC1.76
SWDIO  (via drill 0.35)
  Top 0.254: J1.04 55.28,43.94 54.4,43.06 52.71,43.06 52.7,43.05 47.5,43.05 45.97,44.58 45.97,53.11 44.6,54.48 v43.81,54.48
  Bottom 0.254: v43.81,54.48 43.62,54.68 40.98,54.68 IC1.72
SWO  (via drill 0.35)
  Top 0.254: J1.08 58.3,46.48 v57.66,47.12 | v47.75,48.64 47.75,54.99 v49.15,56.39
  Route2 0.254: v57.66,47.12 57.02,47.12 55.5,48.64 v47.75,48.64
  Bottom 0.254: v49.15,56.39 IC1.89
TOF_GPIO1  (via drill 0.35)
  Route2 0.254: SV1.1 63.75,54.86 63.24,55.37 58.16,55.37 v57.78,54.99
  Bottom 0.254: v57.78,54.99 57.46,54.66 IC1.4
TOF_GPIO2  (via drill 0.35)
  Route2 0.254: v21.84,32.38 v19.43,29.97
  Route15 0.254: v42.57,53.34 42.31,53.34 40.82,51.85 40.82,43 43.69,40.13 v43.69,39.62
  Bottom 0.254: SV2.1 9.78,39.62 v19.43,29.97 | v21.84,32.38 24,34.55 40.54,34.55 43.69,37.69 v43.69,39.62 | IC1.70 40.98,53.69 41.85,53.69 42.19,53.34 v42.57,53.34
TOF_GPIO3
  Bottom 0.254: SV3.1 51.69,17.9 51.69,34.17 49.15,36.7 49.14,36.71 48.14,37.71 IC1.39
TOF_GPIO4
  Bottom 0.254: IC1.45 45.14,37.52 41.02,33.4 24.77,33.4 23.88,32.51 23.88,29.59 27.94,25.53 27.94,8.38 25.27,5.71 22.73,5.71 20.74,3.72 SV4.1
TOF_GPIO5  (via drill 0.35)
  Top 0.254: SV5.1 5.75,88.11 8,85.85 v11.81,85.85
  Bottom 0.254: v11.81,85.85 24.77,85.85 28.2,82.42 28.2,62.83 29.94,61.09 42.8,61.09 43.64,60.24 IC1.78
TOF_GPIO6
  Bottom 0.254: 44.64,60.13 IC1.80
  Bottom 0.305: SV6.1 49.02,64.51 44.64,60.13
TOF_SCL  (via drill 0.35, 0.5)
  Route2 0.254: SV1.3 66.55,49.78 61.98,54.36 58.93,54.36 57.91,53.34 53.34,53.34 52.2,54.48 50.93,54.48 v50.29,55.12 | v45.34,36.32 43.43,36.32 v41.78,37.97
  Route2 0.305: v61.78,69.03 61.78,70.17 54.09,77.86 SV6.3
  Route15 0.254: v56.77,7.11 63.75,14.1 63.75,47.24 66.29,49.78 SV1.3 66.55,49.78 64.01,52.32
  Route15 0.305: 64.01,52.32 64.01,64.67 64.01,65.41 61.78,67.63 v61.78,69.03
  Bottom 0.254: SV4.3 15.74,4.05 18.92,7.24 24.64,7.24 26.67,9.27 26.67,25.02 22.61,29.08 22.61,29.97 18.92,33.66 | SV3.3 59.26,5 57.15,7.11 v56.77,7.11 54.61,7.11 50.55,11.18 50.55,33.66 47.88,36.32 v45.34,36.32 | IC1.92 50.64,55.46 v50.29,55.12 | 18.92,33.66 7.88,44.7 SV2.3 4.32,44.7 6.99,47.37 6.99,80.64 11.05,84.71 11.05,91.41 SV5.3 | v41.78,37.97 41.27,37.97 39.75,36.45 21.72,36.45 18.92,33.66
TOF_SDA  (via drill 0.35)
  Route2 0.254: v52.2,53.59 54,51.79 63.4,51.79 65.15,50.04 65.15,47.75 65.66,47.24 SV1.4 | v5.71,43.81 5.71,45.97 4.45,47.24 SV2.4 | v44.83,35.18 43.31,35.18 v41.4,37.08 | v20.07,33.66 19.05,32.64 v18.92,32.64
  Route15 0.254: SV3.4 56.76,5.91 64.52,13.66 64.52,45.59 66.17,47.24 SV1.4 | v10.16,88.9 12.45,88.9 13.37,89.82 SV5.4
  Bottom 0.254: SV4.4 14.51,5.27 14.51,5.36 17.14,8 24.26,8 26.04,9.78 26.04,24.64 21.97,28.7 21.97,29.59 v18.92,32.64 7.75,43.81 v5.71,43.81 | SV1.4 65.53,47.24 64.14,48.64 64.14,66.55 62.1,66.55 60.96,67.69 | IC1.93 51.14,54.65 v52.2,53.59 | SV2.4 5.46,47.24 6.22,48 6.22,80.9 10.41,85.09 10.41,88.65 v10.16,88.9 | SV3.4 49.94,10.83 49.94,33.5 48.01,35.43 45.09,35.43 v44.83,35.18 | v41.4,37.08 40.13,35.81 22.23,35.81 v20.07,33.66 | 56.58,91.58 SV6.4
  Bottom 0.305: 60.96,67.69 60.96,85.6 56.58,89.98 56.58,91.58
V_BAT
  Top 3: U$6.P$1 14.35,65.41 12.7,63.75 D1.2
V_LS_1
  Bottom 0.2: 53.21,40.77 53.65,41.2 IC1.28
  Bottom 0.254: R5.1 67.17,8.38 62.1,8.38 53.21,17.27 53.21,40.77
  Bottom 0.406: CZ1.KOLEKTOR 67.31,6.45 R5.1
V_LS_2  (via drill 0.35)
  Top 0.254: v12.45,85.09 8.64,85.09 8.26,84.71 v8.26,84.58 | v47.05,53.53 47.05,45.4 47.5,44.96 49.4,44.96 v49.66,45.21
  Route2 0.254: v31.75,57.15 33.66,55.24 45.47,55.24 47.05,53.66 v47.05,53.53
  Route15 0.254: v49.66,45.21 49.91,45.21 51.18,43.94 51.18,41.4 52.07,40.51 v52.58,40.51
  Bottom 0.254: v8.26,84.58 8.26,85.6 7.87,85.98 1.65,85.98 1.41,86.22 R7.1 | v12.45,85.09 24.38,85.09 27.43,82.04 27.43,61.47 v31.75,57.15 | IC1.29 53.16,42.47 53.16,41.48 52.58,40.89 v52.58,40.51
  Bottom 0.508: CZ2.KOLEKTOR 1.4,89.43 R7.1
V_LS_3  (via drill 0.35, 0.5)
  Top 0.305: v66.04,86.36 66.04,87.62 R9.1 v66.93,88.52
  Route15 0.254: 62.99,48.51 58.67,44.2 55.5,44.2 54.86,44.83 53.21,44.83 52.7,44.32 v52.7,43.7
  Route15 0.305: v66.04,86.36 63.37,86.36 60.83,83.82 60.83,67.56 62.99,65.41 62.99,48.51
  Bottom 0.254: v52.7,43.7 52.63,43.62 52.63,42.5 IC1.30
  Bottom 0.305: CZ3.KOLEKTOR 66.93,89.69 v66.93,88.52
V_LS_4  (via drill 0.35)
  Top 0.406: R11.1 v3.17,7.11
  Route2 0.2: 20.19,29.34 v20.07,29.34
  Route2 0.254: v47.62,33.66 47.37,33.4 24.26,33.4 20.19,29.34
  Route15 0.2: 47.75,33.78 v47.62,33.66
  Route15 0.254: v50.16,39.37 47.75,36.96 47.75,33.78
  Bottom 0.2: IC1.31
  Bottom 0.254: IC1.31 52.13,41.49 50.09,39.44 v50.16,39.37 | v20.07,29.34 25.27,24.13 25.27,10.16 23.88,8.76 5.84,8.76 3.32,6.24 CZ4.KOLEKTOR
  Bottom 0.406: v3.17,7.11 3.32,6.96 CZ4.KOLEKTOR
VCAP  (via drill 0.35)
  Bottom 0.254: IC1.48 43.64,41.09 v43.76,40.97
  pour Top (no thermals): 43.54,40.77 43.54,43.69 42.16,43.69 42.16,45.59 45.34,45.59 45.34,43.69 44.02,43.69 44.02,40.77
VCAP_2
  pour Bottom (no thermals): 38.23,56.77 38.23,53.59 39.5,53.59 39.5,55.02 41.78,55.02 41.78,55.24 39.5,55.24 39.5,56.77
VCP_RX  (via drill 0.35)
  Top 0.152: J1.13 62.61,51.18 v61.82,51.18
  Route2 0.254: v57.51,45.09 59.54,45.09 63.11,48.66 63.11,49.88 v61.82,51.18
  Bottom 0.152: IC1.23 57.43,45.16 v57.51,45.09
VCP_TX  (via drill 0.35)
  Top 0.152: v60.38,51.18 60.32,51.18 J1.14
  Route2 0.254: v57.57,46.06 60.38,48.86 v60.38,51.18
  Bottom 0.152: IC1.22 57.18,45.66 v57.57,46.06
VDDA  (via drill 0.35)
  other vias: 54.99,45.72 54.99,46.35 54.99,46.99 54.99,47.62
  pour Top (no thermals): 53.98,50.16 53.98,44.45 55.5,44.45 55.5,50.16
  pour Bottom (no thermals): 57.15,46.86 55.63,46.86 55.5,46.99 55.5,47.88 54.61,47.88 54.61,45.47 55.5,45.47 55.5,45.97 57.15,45.97
XSHUT1  (via drill 0.35)
  Route2 0.254: SV1.2 65.28,52.32 62.74,54.86 58.55,54.86 v57.78,54.1
  Bottom 0.254: v57.78,54.1 57.73,54.15 56.33,54.15 IC1.5
XSHUT2  (via drill 0.35)
  Route2 0.254: v19.18,31.37 20.95,33.15 v21.08,33.15
  Route15 0.254: v43.38,53.65 42.88,54.15 42.37,54.15 40.26,52.05 40.26,42.8 42.67,40.39 v42.67,39.62
  Bottom 0.254: SV2.2 8.38,42.16 v19.18,31.37 | v21.08,33.15 23.11,35.18 40.39,35.18 42.93,37.72 42.93,39.37 v42.67,39.62 | v43.38,53.65 42.87,54.16 IC1.71
XSHUT3
  Bottom 0.254: SV3.2 61.77,6.91 51.14,17.54 51.14,33.9 47.64,37.4 IC1.40
XSHUT4
  Bottom 0.254: IC1.46 44.64,37.78 40.89,34.04 24.51,34.04 23.37,32.89 23.37,29.21 27.3,25.27 27.3,8.76 25.02,6.48 21.21,6.48 18.24,3.51 SV4.2
XSHUT5  (via drill 0.35)
  Top 0.254: SV5.2 8.29,88.36 10.03,86.61 v12.5,86.61
  Bottom 0.254: v12.5,86.61 25.02,86.61 28.96,82.68 28.96,62.99 30.23,61.72 42.93,61.72 44.14,60.51 IC1.79
XSHUT6
  Bottom 0.254: IC1.81 45.14,59.75 | 51.55,90.75 SV6.2
  Bottom 0.305: 45.14,59.75 49.66,64.26 49.66,88.85 51.55,90.75

## Text on the board
tNames: TX | RX